# Altium PCB GPS_1.1.PcbDoc
Units mil, origin at the board's own origin, x right, y up, seen from the top; angles counter-clockwise.
Board outline 1968.5 x 2225 mil, 4 copper layers (Top Layer, GND, VDD, Bottom Layer); 60 components, 48 nets, 263 pads, 114 vias.
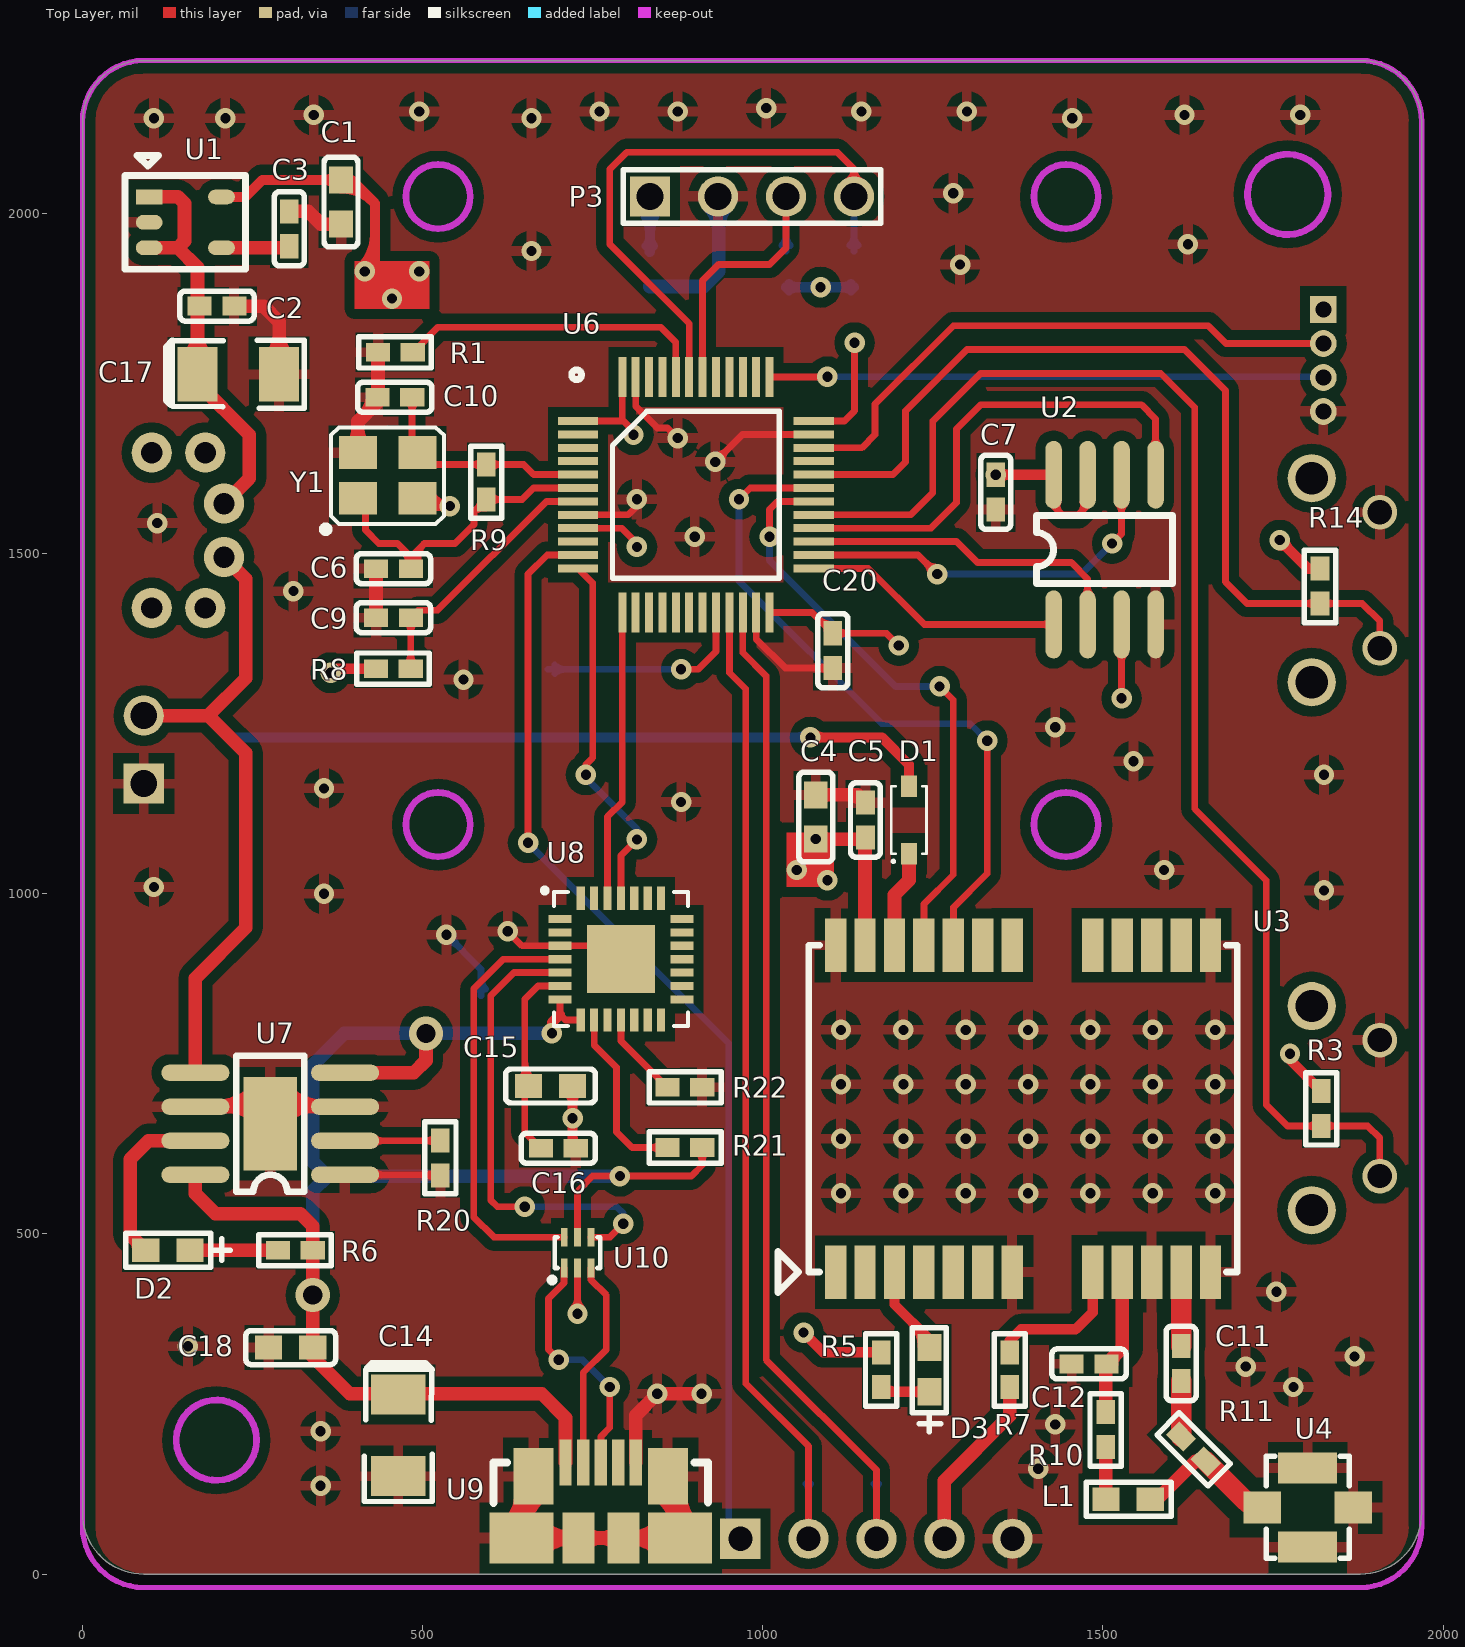
[diagram p0: Top Layer view]
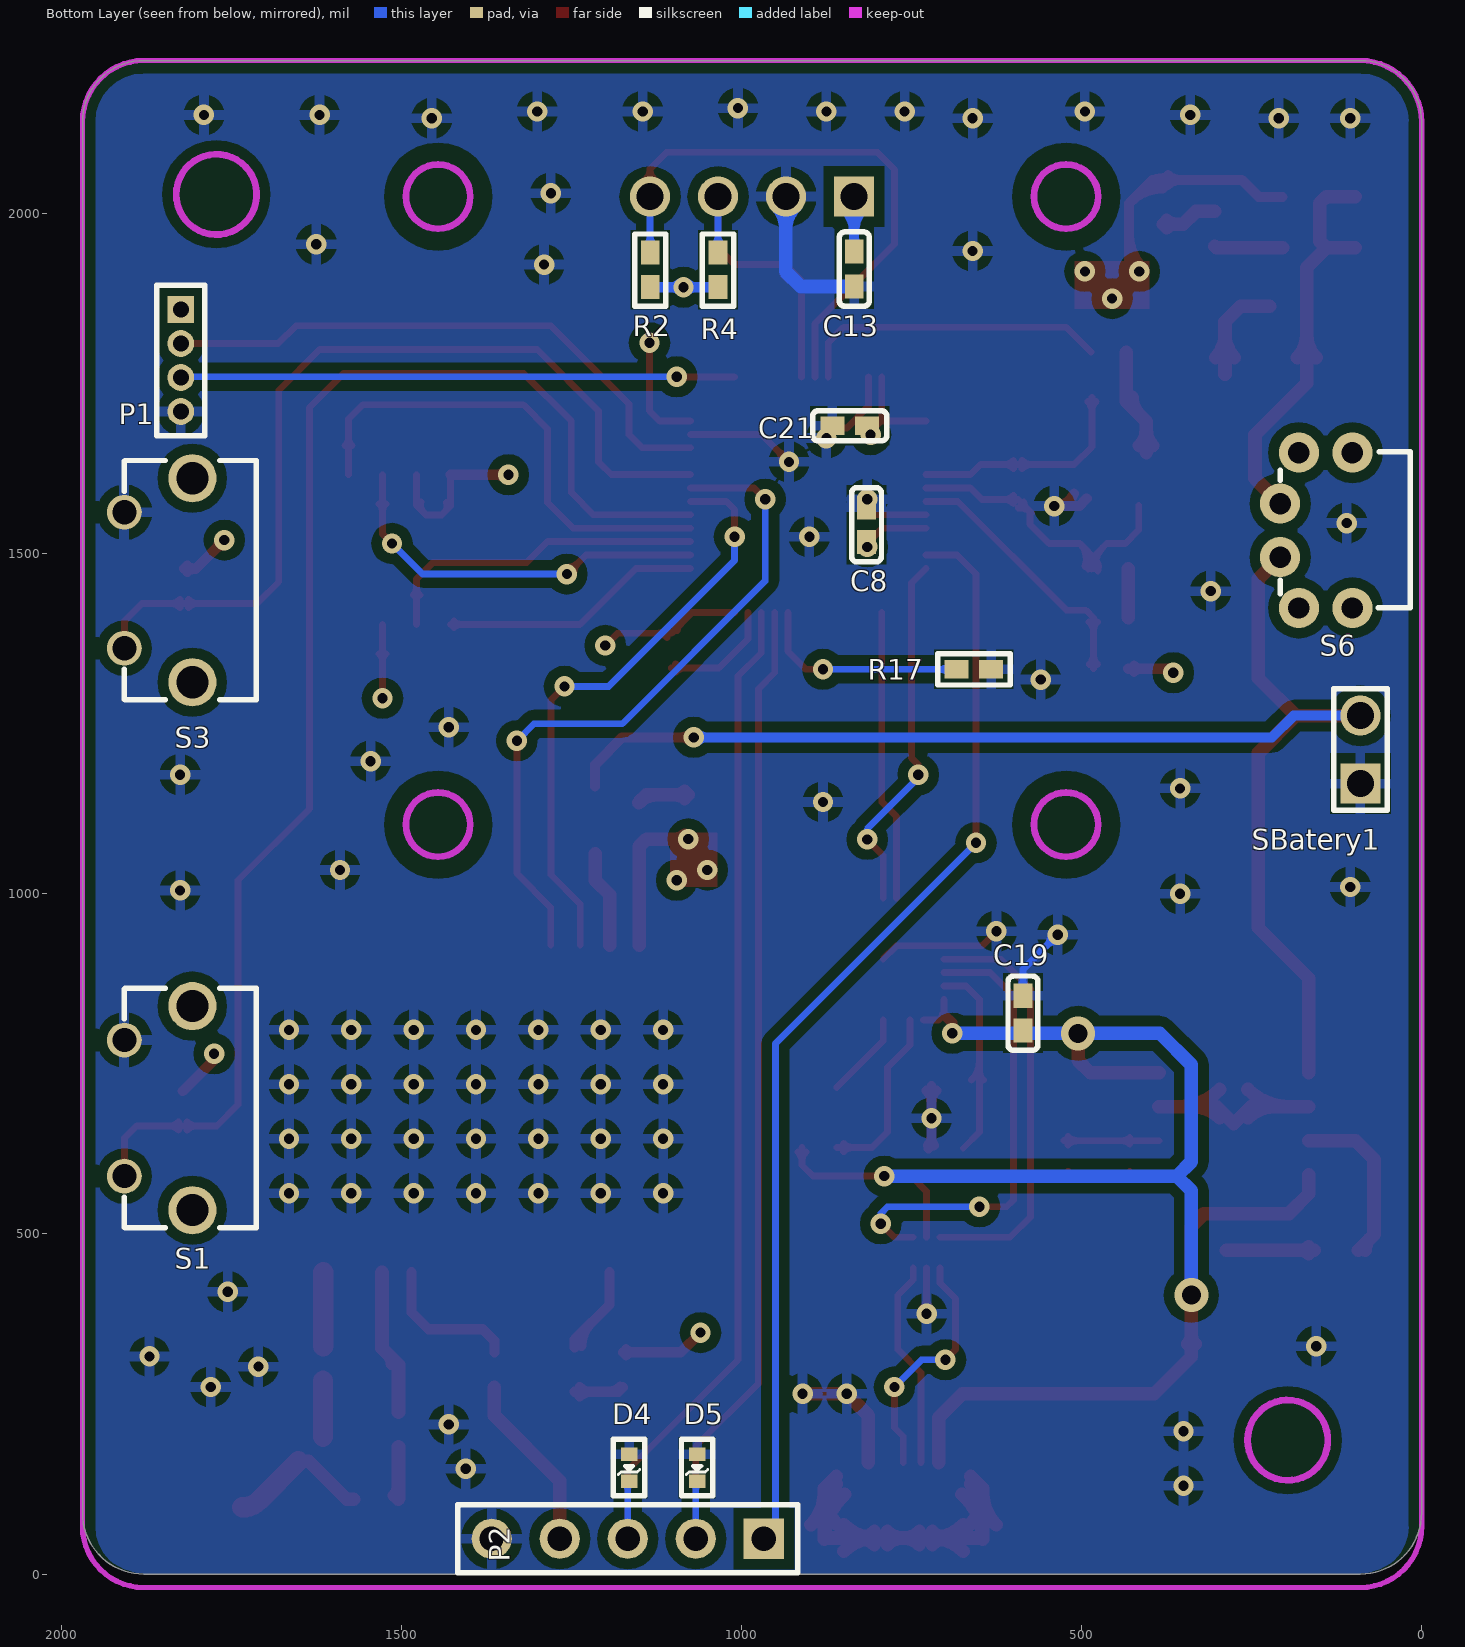
[diagram p1: Bottom Layer view, seen from below]
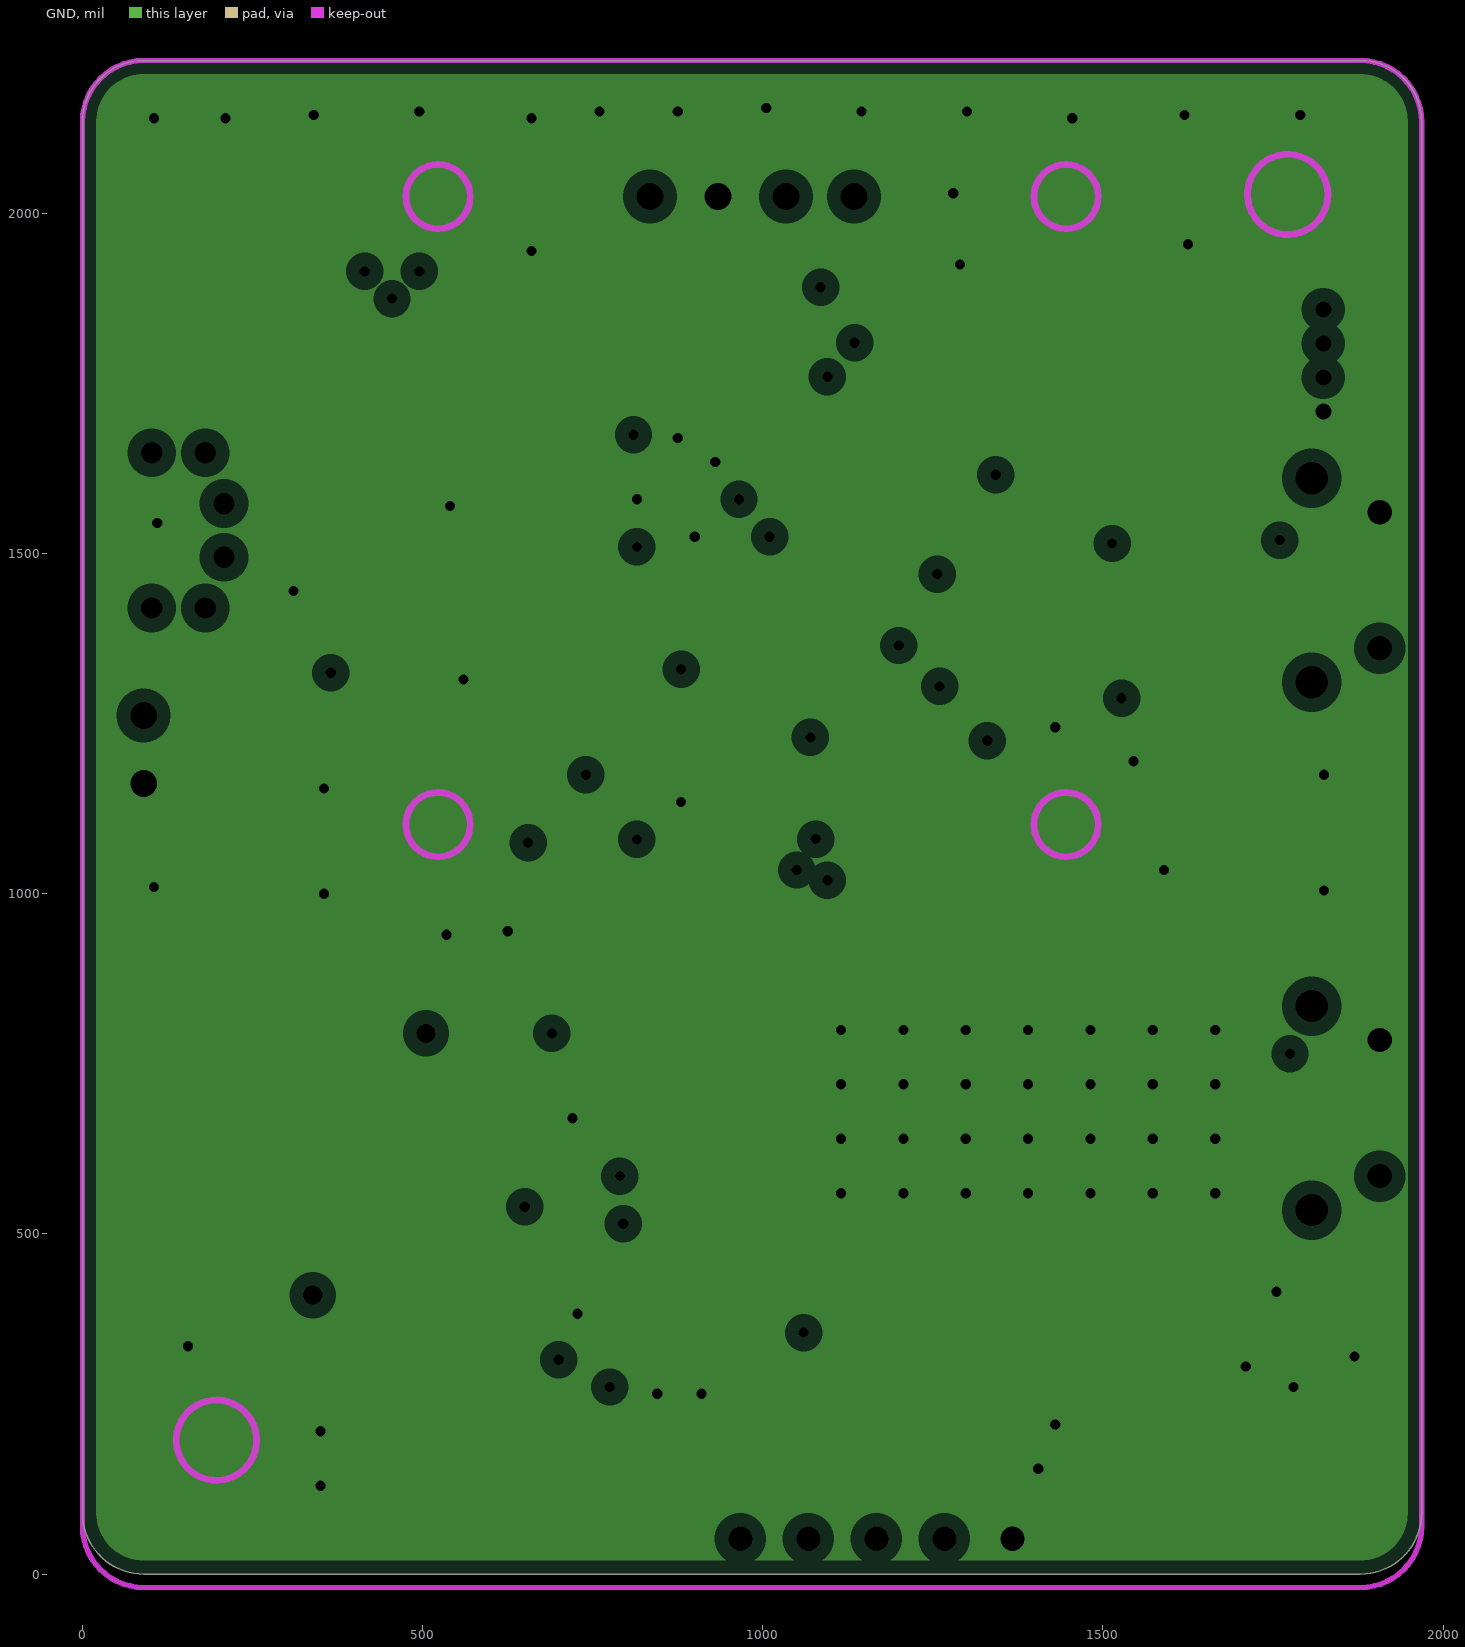
[diagram p2: GND, clearances drawn from the general rule]
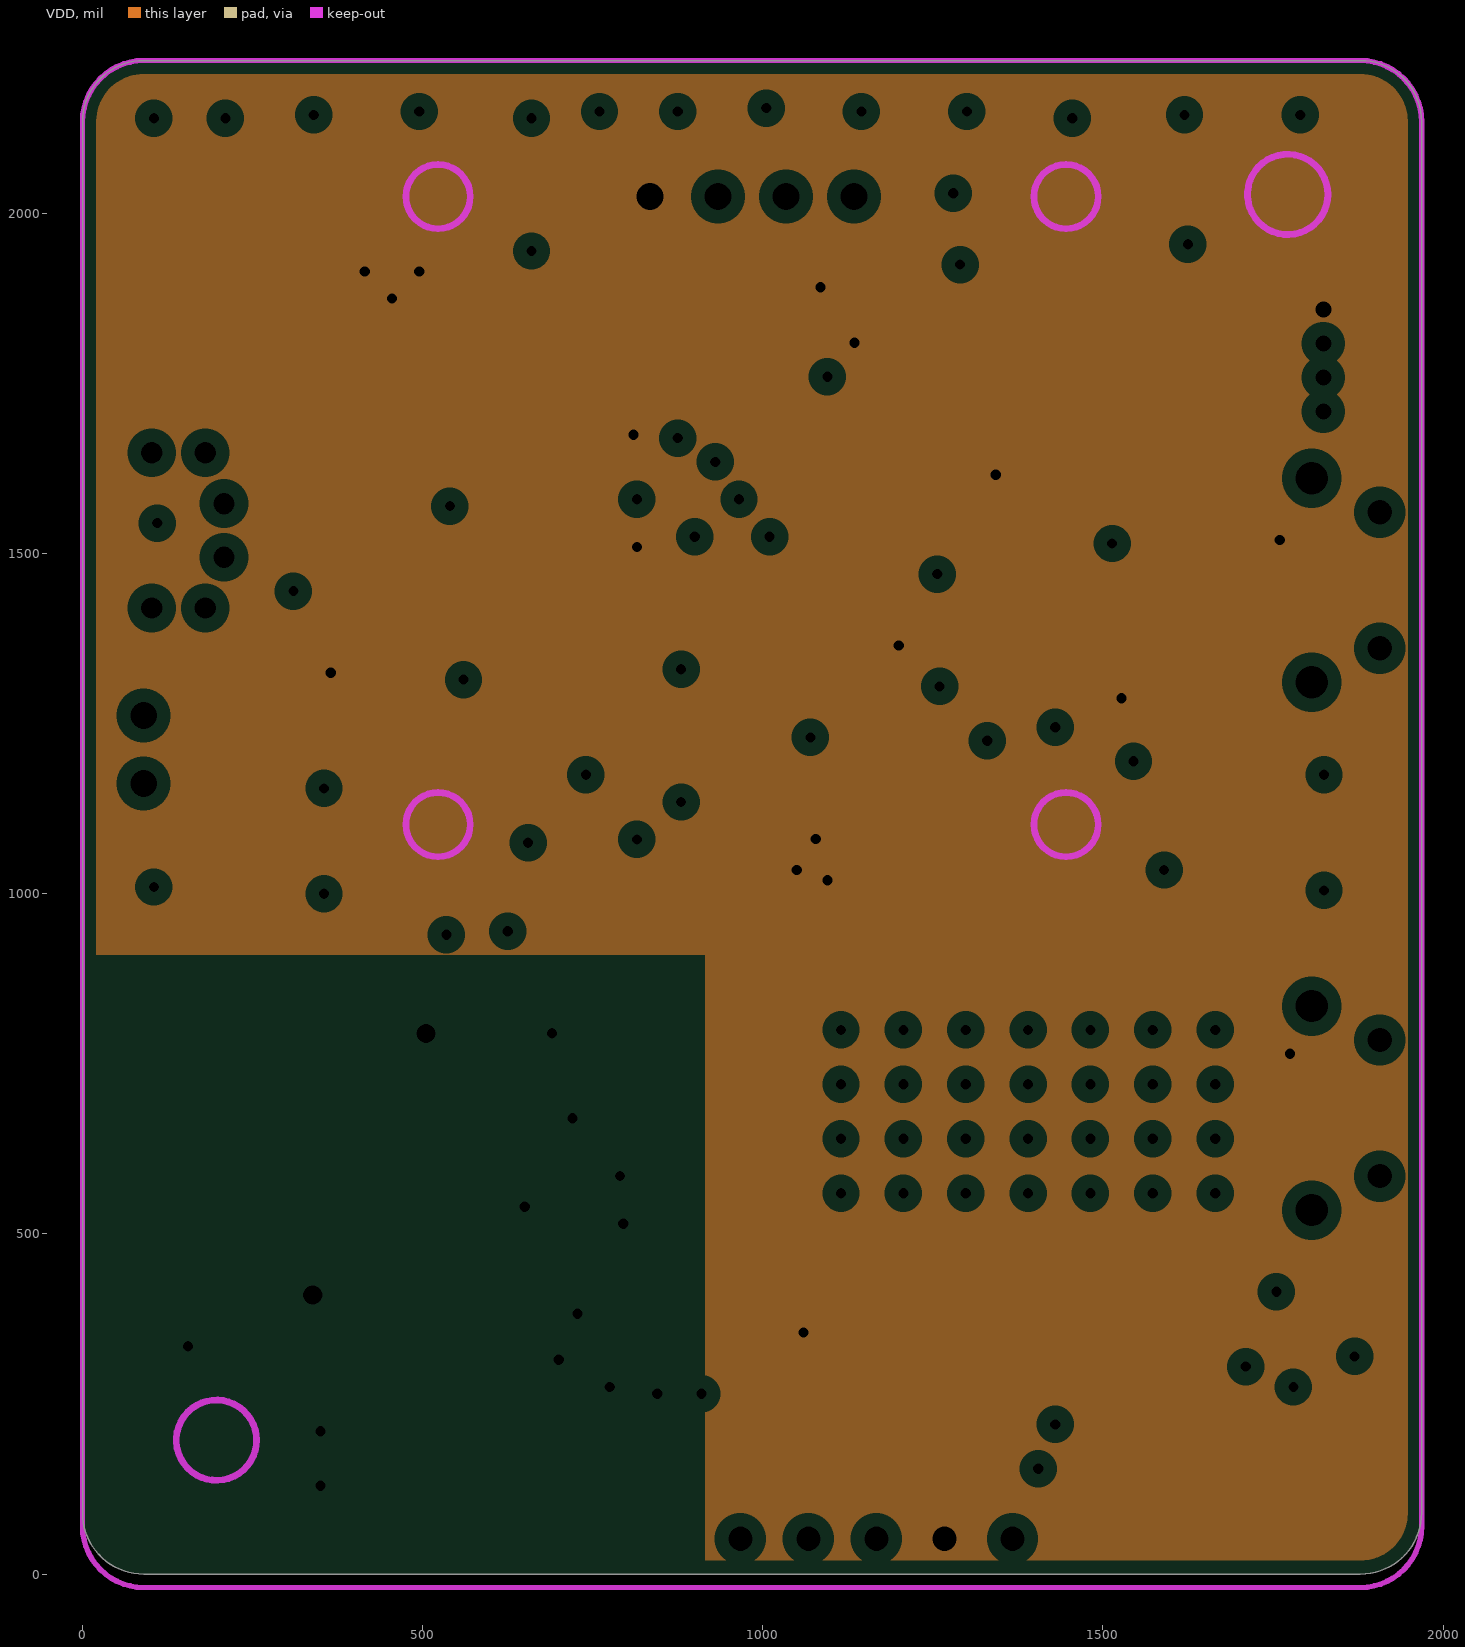
[diagram p3: VDD, clearances drawn from the general rule]

## Layer stack, top to bottom
Top Layer: signal copper 1.4
Dielectric: core 12.6, FR-4, Dk 4.8
GND: plane copper 1.4, net GND
Dielectric: prepreg 12.6, FR-4, Dk 4.8
VDD: plane copper 1.4, net VDD
Dielectric: core 12.6, FR-4, Dk 4.8
Bottom Layer: signal copper 1.4

## Board outline
0,2135 0,90 ccw(c90,90) 90,0 1878.5,0 ccw(c1878.5,90) 1968.5,90 1968.5,2135 ccw(c1878.5,2135) 1878.5,2225 90,2225 ccw(c90,2135) 0,2135

## Design rules (kind name [scope] priority, off if disabled: settings)
Clearance Clearance_1 [InNetClass('RF')] p1: gap=20
Clearance [All] p2: gap=7
DiffPairsRouting [All] p1: maxlimit=10 minlimit=10 mostfreqgap=10 maxuncoupledlength=500
FabricationTestPointUsage TestPointUsage [All] p1: valid=0 allowmultiple=FALSE
FabricationTestpoint Testpoint [All] p1: side=3 testpointundercomponent=TRUE minsize=40 maxsize=100 preferedsize=60 minholesize=0 maxholesize=40 preferedholesize=32 testpointgrid=1 allowsidetop=TRUE allowsidebottom=TRUE usegrid=TRUE gridtolerance=0.01
MinimumSolderMaskSliver [All] p1 off: minsoldermaskwidth=10
PlaneClearance [All] p1: clearance=20
PlaneConnect [All] p1: planeconnectstyle=Relief reliefexpansion=20 reliefentries=4 reliefconductorwidth=15 reliefairgap=10
PolygonConnect [All] p1: connectstyle=Relief reliefconductorwidth=15 reliefentries=4 polygonreliefangle="90 Angle"
RoutingVias [All] p1: holewidth=28 width=50 viastyle="Through Hole" minholewidth=0 minwidth=0 maxholewidth=28 maxwidth=50
SilkToSilkClearance [All] p1 off: silktosilkclearance=10
SilkscreenOverComponentPads [All] p1 off: minsilkscreentomaskgap=10
SolderMaskExpansion [All] p1: expansion=4
Width [All] p1: maxlimit=50 minlimit=10 preferedwidth=10
20 further rules are at their usual default settings.

## Classes and differential pairs
net class RF: NetC11_1 NetL1_1 NetL1_2 RF_IN RF_VCC
differential pair D: +D_P -D_N

## Components (designator, comment, footprint, x,y, rotation, side; value= is the part's Value field where it differs from the comment)
C1 "10uF/10V" C0603 380,2017 r90 top
C2 "0.1uF/10V" C0402 172,1864 r180 top
C3 "0.01uF/10V" C0402 304,1952 r270 top
C4 "10uF/10V" C0603 1078,1113 r90 top
C5 "0.1uF/10V" C0402 1151,1083 r270 top
C6 "18pF/10V" C0402 431.5,1478 r180 top
C7 "0.01uF/10V" C0402 1342.5,1616 r90 top
C8 "0.01uF/10V" C0402 816,1517 r270 bottom
C9 "0.01uF/10V" C0402 431.5,1406 r180 top
C10 "18pF/10V" C0402 433.5,1730 r180 top
C11 "470pF" C0402 1615,284 r270 top
C12 "33nF" C0402 1454,309 r180 top
C13 "0.1uF/10V" C0402 834,1892.82 r270 bottom
C14 "10uF/10V" 3528 464,264 r270 top
C15 "4.7uF/10V" C0603 688,717.5 r180 top
C16 "0.1uF/10V" C0402 673.82,626 r180 top
C17 "10uF/10V" 3528 169,1764 r0 top
C18 "10uF/10V" C0603 306,333 r180 top
C19 "0.1uF/10V" C0402 586,799 r270 bottom
C20 "0.01uF/10V" C0402 1103,1383 r90 top
C21 "0.01uF/10V" C0402 815,1688 r180 bottom
D1 "RB751V40T1" SOD323 1215,1158 r90 top
D2 "LED0" LED0603 158,476 r180 top
D3 "LED0" LED0603 1245,268 r90 top
D4 "PESD0402-140" 0402-TVS 1167,124 r270 bottom
D5 "PESD0402-140" 0402-TVS 1067,124 r270 bottom
L1 "6.8nH" R0603 1537,110 r180 top
P1 "MHDR1X4" SIP4_1.27 1824,1859 r0 bottom
P2 "Header 5" HDR1X5 967,52 r0 bottom
P3 "MHDR1X4" OLED 984.25,2025 r0 top locked
R1 "10K/5%" R0402 485.5,1796 r0 top
R2 "5.1K/5%" R0402 1134,1943 r90 bottom
R3 "10K/5%" R0402 1821,710 r90 top
R4 "5.1K/5%" R0402 1034.25,1943 r90 bottom
R5 "510R" R0402 1174,326 r90 top
R6 "1K/5%" R0402 338.46,476 r0 top
R7 "10K/5%" R0402 1363,326 r90 top
R8 "10K/5%" R0402 482.5,1331 r0 top
R9 "1M/5%" R0402 593.5,1631 r90 top
R10 "50R" R0402 1504,238 r90 top
R11 "0R" R0402 1615,202 r135 top
R14 "10K/5%" R0402 1819,1478 r90 top
R17 "10K/5%" R0402 684,1330 r0 bottom
R20 "2K/5%" R0402 526,586 r270 top
R21 "1K/5%" R0402 859.82,627 r180 top
R22 "10K/5%" R0402 859.82,715.5 r180 top
S1 "SW-PB" KEY2 1907,685 r270 bottom
S3 "SW-PB" KEY2 1907,1461 r270 bottom
S6 "SW-PB" KEY1 208,1573.74 r270 bottom
SBatery1 "SBatery" SIP2 90,1162 r90 bottom
U1 "TPS73633DBVR" SOP5-TPS73633DBVR 98,2024.5 r0 top
U2 "FM25V01" SO-8 1427.5,1396 r90 top
U3 "NEO-M8N" NEO-M8N 1107,444 r0 top
U4 "antenna" "Active antenna" 1801,98 r180 top
U6 "STM32F10xC8T6" LQFP-48 728.5,1695 r0 top
U7 "TP4056" SO-8-1 276,662 r180 top
U8 "CP2102" QFN-28 702,963 r0 top
U9 "USB" MOLEX-47346-0001 710,164 r0 top
U10 "NUF2042XV6T1" UDFN 708,450 r0 top
Y1 "16MHz" OSCILLATOR-3.2X2.5 448.5,1615 r90 top

## Footprints (in the part's own frame and the unit in brackets; to place one, negate y for a bottom-side part, rotate by r counter-clockwise, add the part's x,y. Pads: shape width x height; smd on the part's side, far side on the other; paste and mask are expansions set on the pad)
0402-TVS [mil]
  rect 20x24 smd: 1(-52,2) 2(-12.31,2)
  silkscreen extent -74,-21 9,25
3528 [mil]
  rect 59.05x80 smd: 1(0,0) 2(120,0)
  silkscreen extent -46,-50 157,50
"Active antenna" [mm]
  rect 1.4x1.2 smd: 0(-1.7,0) 1(1.7,0)
  rect 2.2x1.15 smd: 0(0,1.475) 0(0,-1.475)
  silkscreen extent -1.55,-1.91 1.55,1.91
C0402 [mm]
  rect 0.9x0.7 smd: 1(0,0) 2(-1.3,0)
  silkscreen extent -2.04,-0.56 0.74,0.56
C0603 [mil]
  rect 40x35 smd: 1(-32.5,0) 2(32.5,0)
  silkscreen extent -66,-25 66,25
HDR1X5 [mm] "Connector; Header; 5 Position"
  rect 1.5x1.5 hole 0.9: 1(0,0)
  round 1.5 hole 0.9: 2(2.54,0) 3(5.08,0) 4(7.62,0) 5(10.16,0)
  silkscreen extent -1.27,-1.27 11.43,1.27
KEY1 [mm]
  round 1.5 hole 0.8: 0(-1.9,0.7) 0(-1.9,2.7) 0(3.9,0.7) 0(3.9,2.7) 1(0,0) 2(2,0)
  silkscreen extent -1.93,0 3.89,4.85
KEY2 [mm]
  round 1.8 hole 1.2: 0(-3.81,2.54) 0(3.81,2.54)
  round 1.3 hole 0.9: 1(-2.54,0) 2(2.54,0)
  silkscreen extent -4.47,0 4.47,4.93
LED0603 [mil]
  rect 40x35 smd: 1(0,0) 2(65,0)
  silkscreen extent -59,-25 94,25
LQFP-48 [mm]
  rect 1.5x0.3 smd: 1(0,0) 2(0,-0.5) 3(0,-1) 4(0,-1.5) 5(0,-2) 6(0,-2.5) 7(0,-3) 8(0,-3.5) 9(0,-4) 10(0,-4.5) 11(0,-5) 12(0,-5.5) 25(8.8,-5.5) 26(8.8,-5) 27(8.8,-4.5) 28(8.8,-4) 29(8.8,-3.5) 30(8.8,-3) 31(8.8,-2.5) 32(8.8,-2) 33(8.8,-1.5) 34(8.8,-1) 35(8.8,-0.5) 36(8.8,0)
  rect 0.3x1.5 smd: 13(1.65,-7.15) 14(2.15,-7.15) 15(2.65,-7.15) 16(3.15,-7.15) 17(3.65,-7.15) 18(4.15,-7.15) 19(4.65,-7.15) 20(5.15,-7.15) 21(5.65,-7.15) 22(6.15,-7.15) 23(6.65,-7.15) 24(7.15,-7.15) 37(7.15,1.65) 38(6.65,1.65) 39(6.15,1.65) 40(5.65,1.65) 41(5.15,1.65) 42(4.65,1.65) 43(4.15,1.65) 44(3.65,1.65) 45(3.15,1.65) 46(2.65,1.65) 47(2.15,1.65) 48(1.65,1.65)
  silkscreen extent -0.24,-5.86 7.51,1.91
MOLEX-47346-0001 [mil]
  rect 18x67 smd: 1(0,0) 2(26,0) 3(52,0) 4(77.59,0) 5(103.18,0)
  rect 94x75 smd: 6(-65,-111) 9(168.14,-111)
  rect 59x83 smd: 7(-47,-20) 8(150.43,-20)
  rect 47x75 smd: 10(84.97,-111) 11(19,-111)
  silkscreen extent -106,-59 209,0
NEO-M8N [mm]
  rect 0.8x2 smd: 1(0,0) 2(1.1,0) 3(2.2,0) 4(3.3,0) 5(4.4,0) 6(5.5,0) 7(6.6,0) 8(9.6,0) 9(10.7,0) 10(11.8,0) 11(12.9,0) 12(14,0) 13(14,12.2) 14(12.9,12.2) 15(11.8,12.2) 16(10.7,12.2) 17(9.6,12.2) 18(6.6,12.2) 19(5.5,12.2) 20(4.4,12.2) 21(3.3,12.2) 22(2.2,12.2) 23(1.1,12.2) 24(0,12.2)
  silkscreen extent -2.14,-0.76 15,12.2
OLED [mm]
  rect 1.5x1.5 hole 1: 1(-3.81,0)
  round 1.5 hole 1: 2(-1.27,0) 3(1.27,0) 4(3.81,0)
  Keep-Out Layer circle w0.254: c11.725,-23.45 r1.2
  Keep-Out Layer circle w0.254: c-11.725,0 r1.2
  Keep-Out Layer circle w0.254: c11.725,0 r1.2
  Keep-Out Layer circle w0.254: c-11.725,-23.45 r1.2
  silkscreen extent -4.81,-1 4.81,1
OSCILLATOR-3.2X2.5 [mil]
  rect 48x56 smd: 1(-33.73,43.65) 2(-33.73,-43.65) 3(33.73,-43.65) 4(33.73,43.65)
  silkscreen extent -83,-83 71,95
QFN-28 [mil]
  rect 34x12 smd mask+5: 1(0,0) 2(0,-19.68) 3(0,-39.37) 4(0,-59.06) 5(0,-78.74) 6(0,-98.43) 7(0,-118.11) 15(179,-118.11) 16(179,-98.43) 17(179,-78.74) 18(179,-59.06) 19(179,-39.37) 20(179,-19.68) 21(179,0)
  rect 12x34 smd mask+5: 8(30.44,-148.56) 9(50.13,-148.56) 10(69.82,-148.56) 11(89.5,-148.56) 12(109.18,-148.56) 13(128.87,-148.56) 14(148.56,-148.56) 22(148.56,30.44) 23(128.87,30.44) 24(109.18,30.44) 25(89.5,30.44) 26(69.82,30.44) 27(50.13,30.44) 28(30.44,30.44)
  rect 100x100 smd mask+5: 29(89.5,-59.06)
  silkscreen extent -25,-158 188,44
R0402 [mm]
  rect 0.9x0.7 smd: 1(0,0) 2(-1.3,0)
  silkscreen extent -2.01,-0.58 0.69,0.58
R0603 [mil]
  rect 40x35 smd: 1(-32.5,0) 2(32.5,0)
  silkscreen extent -63,-25 62,25
SIP2 [mm]
  rect 1.5x1.5 hole 1: 1(0,0)
  round 1.5 hole 1: 2(2.54,0)
  silkscreen extent -1,-1 3.54,1
SIP4_1.27 [mm]
  rect 1x1 hole 0.6: 1(0,0)
  round 1 hole 0.6: 2(0,1.27) 3(0,2.54) 4(0,3.81)
  silkscreen extent -0.9,-0.9 0.9,4.71
SO-8 [mil]
  oval 100x24 smd: 1(0,0) 2(0,-50) 3(0,-100) 4(0,-150) 5(220,-150) 6(220,-100) 7(220,-50) 8(220,0)
  silkscreen extent 60,-175 160,25
SO-8-1 [mil]
  rect 78.74x137.8 smd: 0(0,0)
  oval 100x24 smd: 1(-110,75) 2(-110,25) 3(-110,-25) 4(-110,-75) 5(110,-75) 6(110,-25) 7(110,25) 8(110,75)
  silkscreen extent -50,-100 50,100
SOD323 [mil]
  rect 32x24 smd: 1(0,0) 2(-99.21,0)
  silkscreen extent -112,-26 0,26
SOP5-TPS73633DBVR [mm]
  rect 1x0.55 smd: 1(0,0)
  oval 1x0.55 smd: 2(0,-0.95) 3(0,-1.9) 4(2.7,-1.9) 5(2.7,0)
  silkscreen extent -0.9,-2.7 3.6,1.55
UDFN [mm]
  rect 0.25x0.7 smd: 1(0,0) 2(0.5,0) 3(1,0) 4(1,1.15) 5(0.5,1.15) 6(0,1.15)
  silkscreen extent -0.55,-0.55 1.35,1.15

## Part data
C1 C2 C3 C4 C5 C6 C7 C8 C9 C10 C11 C12 C13 C15 C16 C18 C19 C20 C21: library part Cap, "Capacitor"
C14 C17: library part "Cap Pol2", "Polarized Capacitor (Axial)"
D1: library part Diode, "Default Diode"
D2 D3: "Typical INFRARED GaAs LED"
D4 D5: library part "D Zener", "Zener Diode"
L1: library part Inductor, "Inductor"
P1 P3: "Header, 4-Pin"
P2: "Header, 5-Pin"
R1 R2 R3 R4 R5 R6 R7 R8 R9 R10 R11 R14 R17 R20: library part Res2, "Resistor"
R21 R22: library part Resistor, "Resistor SMD - IEC symbol version"
S1 S3 S6: "Switch"
U2: library part FM25CL64B
U6: library part STM32F100C8T6
U8: "Imported"
U9: library part MICRO_USB
Y1: library part XTAL3

## Via types
v1: diameter 30, hole 15, Top Layer to Bottom Layer, 112 vias
v2: diameter 50, hole 28, Top Layer to Bottom Layer, 2 vias

## Nets (pads, with @x,y where several pads share a name; then routed paths per layer and width w, separated by ;. In a path a pad name is that pad's centre, name@x,y a point inside that pad or via, vN(x,y) a via of type N, cw(c..) or ccw(c..) an arc to the next point about the centre after c; other vN are vias at no path point)
BAT: D1.1 S6.2 SBatery1.2 U7.5 | length 2186.2
  Top Layer w15: v1(1070,1230) 1175,1230 1215,1190 D1.1 ; v1@1075.3,1224.7 cw(c1088.11,1211.89) 1088.11,1230 cw(c1088.11,1248.11) v1@1075.3,1235.3
  Top Layer w20: SBatery1.2 185,1262 ; U7.5 166,876 240,950 240,1207.19 ; S6.2 240,1463 240,1317 185,1262 ; 239.91,1207.09 185,1262
  Bottom Layer w15: SBatery1.2 188,1262 220,1230 v1(1070,1230) ; v1@1064.7,1224.7 ccw(c1051.89,1211.89) 1051.89,1230 ccw(c1051.89,1248.11) v1@1064.7,1235.3
D_N: U8.5 U10.4 | length 690.3
  Top Layer w10: v1(650,540) 610,540 600,550 600,850 634.26,884.26 U8.5 ; U10.4 775.28,495.28 v1(795,515)
  Bottom Layer w10: v1(650,540) 785,540 795,530 v1(795,515)
D_P: U8.4 U10.6 | length 625.5
  Top Layer w10: U8.4 618.94,903.94 575,860 575,525 604.72,495.28 U10.6
FRAM_CLK: U2.6 U6.26 | length 640.1
  Top Layer w10: U6.26 1228.35,1498.15 v1(1256.5,1470) ; v1@1246.5,1470 ccw(c1222.36,1470) 1239.43,1487.07 ccw(c1256.5,1504.14) v1@1256.5,1480 ; v1(1513.5,1515) 1527.5,1529 U2.6 ; U2.6@1522.55,1573.05 cw(c1510.6,1561.1) 1527.5,1561.1 cw(c1544.4,1561.1) U2.6@1532.45,1573.05
  Bottom Layer w10: v1(1256.5,1470) 1468.5,1470 v1(1513.5,1515)
FRAM_CS: U2.1 U6.25 | length 413.2
  Top Layer w10: U6.25 1155.04,1478.47 1237.5,1396 U2.1 ; U2.1@1422.55,1391.05 ccw(c1410.6,1379.1) 1410.6,1396 ccw(c1410.6,1412.9) U2.1@1422.55,1400.95
FRAM_MISO: U2.2 U6.27 | length 518.8
  Top Layer w10: U6.27 1284.67,1517.84 1315.5,1487 1453.5,1487 1477.5,1463 U2.2 ; U2.2@1472.55,1438.95 ccw(c1460.6,1450.9) 1477.5,1450.9 ccw(c1494.4,1450.9) U2.2@1482.45,1438.95
FRAM_MOSI: U2.5 U6.28 | length 758.5
  Top Layer w10: U6.28 1247.52,1537.52 1285,1575 1285,1683.5 1320.5,1719 1556.5,1719 1577.5,1698 U2.5 ; U2.5@1572.55,1658.95 ccw(c1560.6,1670.9) 1577.5,1670.9 ccw(c1594.4,1670.9) U2.5@1582.45,1658.95
GND: C1.1 C2.2 C3.2 C4.2 C5.2 C6.1 C7.2 C8.2 C9.1 C10.1 C12.1 C13.1 C14.2 C15.1 C16.2 C17.2 C18.2 C19.2 C20.2 C21.2 D4.1 D5.1 P1.4 P2.5 P3.2 R1.2 R17.2 R20.1 R22.2 S1.1 S3.1 SBatery1.1 U1.2 U2.4 U3.7 U3.10 U3.12 U3.13 U3.24 U4.0 U6.8 U6.23 U6.35 U6.47 U7.0 U7.1 U7.3 U7.6 U8.3 U8.29 U9.5 U9.6 U9.7 U9.8 U9.9 U9.10 U9.11 U10.2 Y1.2 Y1.4 | length 4553.1
  Top Layer w10: U7.1 525,587 R20.1 ; U7.1@428.95,582.05 cw(c440.9,570.1) 440.9,587 cw(c440.9,603.9) U7.1@428.95,591.95 ; 502.39,587 cw(c502.39,562.39) R20.1@519.79,579.79 ; 507.22,587 ccw(c507.22,604.78) R20.1@519.79,592.21 ; v1(625,945) 646.37,923.63 U8.3 771.82,923.63 U8.29 ; v1@720.61,389.76 ccw(c703.54,406.83) 727.69,406.83 ccw(c751.83,406.83) v1@734.76,389.76 ; v1(727.68,382.68) U10.2 ; U6.8 802.21,1557.2 815,1570 v1(815,1580) ; U6.47 813.15,1716.85 845,1685 860,1685 v1(875,1670) ; v1(930,1635) 970.32,1675.32 U6.35 ; v1@930,1645 ccw(c930,1669.14) 947.07,1652.07 ccw(c964.14,1635) v1@940,1635 ; U6.23 990.31,1374.69 1033.18,1331.82 C20.2 ; C20.2@1096.79,1325.61 ccw(c1081.8,1310.62) 1081.8,1331.82 ccw(c1081.8,1353.01) C20.2@1096.79,1338.03
  Top Layer w15: Y1.2 503.43,1570 v1(540,1570) cw(c540,1601.99) Y1.2@511.07,1588.32 ; C15.1@713.43,710.43 cw(c696.36,693.36) 720.5,693.36 cw(c744.64,693.36) C15.1@727.57,710.43 ; C16.2@716.62,630.44 ccw(c707.26,639.8) 720.5,639.8 ; 720.5,642.52 ccw(c737.58,642.52) C16.2@725.5,630.44 ; C15.1 720.5,630.5 C16.2
  Top Layer w20: U7.6 251,687 U7.0 301,687 U7.3 ; U7.6@194.16,687 ccw(c194.16,773.36) U7.0@255.23,712.3 ; 216.02,687 cw(c216.02,631.55) U7.0@255.23,670.76 ; C2.2 266,1864 289,1841 C17.2 ; C17.2@275.19,1788.28 ccw(c241.86,1821.62) 289,1821.62 ccw(c336.14,1821.62) C17.2@302.81,1788.28 ; U7.0@296.77,670.76 cw(c335.98,631.55) 335.98,687 ; U7.0@296.77,712.3 ccw(c357.84,773.36) U7.3@357.84,687 ; C3.2 331.82,2003.18 350.5,1984.5 C1.1 ; C1.1@374.7,1979.2 ccw(c361.89,1966.39) 361.89,1984.5 ccw(c361.89,2002.61) C1.1@374.7,1989.8 ; Y1.4@394.95,1658.63 ccw(c371.05,1682.53) 404.85,1682.53 ccw(c438.65,1682.53) Y1.4@414.75,1658.63 ; Y1.4 404.85,1694.35 433.5,1723 434.32,1723.82 R1.2 ; 415.38,1704.88 ccw(c390.26,1730) C10.1@425.79,1730 ; C9.1 C6.1 ; U9.6@625.55,72.45 ccw(c578.61,119.39) 645,119.39 ccw(c711.39,119.39) U9.6@664.45,72.45 ; U9.6@645,50.98 cw(c731.77,50.98) U9.7@675.62,117.13 ; 645,94.19 cw(c695.09,94.19) U9.7@662.68,132.38 ; U9.7 645,126 U9.6 U9.11 U9.10 U9.9 878.14,126.28 U9.8 ; U9.6@673.95,33.55 cw(c720.89,-13.39) 720.89,53 cw(c720.89,119.39) U9.6@673.95,72.45 ; U9.11@719.45,43.45 ccw(c696.41,20.41) 696.41,53 ccw(c696.41,85.59) U9.11@719.45,62.55 ; U9.11@738.55,43.45 cw(c761.59,20.41) 761.59,53 cw(c761.59,85.59) U9.11@738.55,62.55 ; U9.10@785.43,43.45 ccw(c762.38,20.41) 762.38,53 ccw(c762.38,85.59) U9.10@785.43,62.55 ; U9.10@804.52,43.45 cw(c827.56,20.41) 827.56,53 cw(c827.56,85.59) U9.10@804.52,62.55 ; U9.5 813.18,233.18 v1(845,265) v1(910,265) ; U9.8@847.73,117.2 cw(c790.98,51.04) U9.9@878.14,51.04 ; U9.9@849.2,33.55 ccw(c802.25,-13.39) 802.25,53 ccw(c802.25,119.39) U9.9@849.2,72.45 ; U9.9@858.7,72.45 ccw(c811.75,119.39) 878.14,119.39 ccw(c944.53,119.39) U9.9@897.59,72.45 ; U9.8@860.75,132.38 cw(c828.3,94.55) 878.14,94.55 ; C4.2 1139.68,1145.5 C5.2 ; C4.2@1083.3,1140.2 cw(c1096.11,1127.39) 1096.11,1145.5 cw(c1096.11,1163.61) C4.2@1083.3,1150.8 ; 1124.05,1145.5 cw(c1124.05,1111.17) C5.2@1148.33,1135.45
  Bottom Layer w10: v1@535,930 cw(c535,905.86) 552.07,922.93 cw(c569.14,940) v1@545,940 ; v1(535,940) 586,889 C19.2 ; C19.2@579.79,860.33 ccw(c564.8,875.31) 586,875.31 ccw(c607.2,875.31) C19.2@592.21,860.33
  Bottom Layer w20: C13.1 912.82,1892.82 935,1915 935,2024.25 P3.2 ; P3.2@920.44,2011.19 cw(c885.3,1976.05) 935,1976.05 ; 935,1979.66 cw(c979.59,1979.66) P3.2@948.06,2011.19
  other v1: 350,130 1405,155 350,210 1430,220 1780,275 1710,305 1870,320 155,335 1755,415 1115,560 1206.67,560 1298.33,560 1390,560 1481.67,560 1573.33,560 1665,560 1115,640 1206.67,640 1298.33,640 1390,640 1481.67,640 1573.33,640 1665,640 720.5,670 1115,720 1206.67,720 1298.33,720 1390,720 1481.67,720 1573.33,720 1665,720 1115,800 1206.67,800 1298.33,800 1390,800 1481.67,800 1573.33,800 1665,800 355,1000 1825,1005 105,1010 1590,1035 880,1135 355,1155 1825,1175 1545,1195 1430,1245 560,1315 310,1445 900,1525 110,1545 1290,1925 660,1945 1625,1955 1280,2030 105,2140 210,2140 660,2140 1455,2140 340,2145 1620,2145 1790,2145 495,2150 760,2150 875,2150 1145,2150 1300,2150 1005,2155
KEY0: R3.2 S1.2 U6.29 | length 2106.7
  Top Layer w10: U6.29 1217.21,1557.2 1250,1590 1250,1695 1320,1765 1585,1765 1635,1715 1635,1125 1740,1020 1740,690 1771.18,658.82 R3.2 1889.18,658.82 1907,641 S1.2 ; R3.2@1814.79,652.61 ccw(c1799.8,637.62) 1799.8,658.82 ccw(c1799.8,680.01) R3.2@1814.79,665.03 ; R3.2@1827.21,652.61 cw(c1842.2,637.62) 1842.2,658.82 cw(c1842.2,680.01) R3.2@1827.21,665.03
KEY1: U6.33
KEY2: R14.2 S3.2 U6.32 | length 1388.8
  Top Layer w10: U6.32 1191.26,1616.26 1210,1635 1210,1710 1300,1800 1620,1800 1680,1740 1680,1458.64 1711.82,1426.82 R14.2 1881.18,1426.82 1907,1401 S3.2 ; R14.2@1812.79,1420.61 ccw(c1797.8,1405.62) 1797.8,1426.82 ccw(c1797.8,1448.01) R14.2@1812.79,1433.03 ; R14.2@1825.21,1420.61 cw(c1840.2,1405.62) 1840.2,1426.82 cw(c1840.2,1448.01) R14.2@1825.21,1433.03
NetC2_1: C2.1 C17.1 S6.1 U1.1 U1.3 | length 676.6
  Top Layer w20: U1.3 140,1949.7 ; U1.1 98.5,2025 140,2025 150,2015 150,1959.7 140,1949.7 ; C17.1@155.19,1788.28 ccw(c121.86,1821.62) 169,1821.62 ccw(c216.14,1821.62) C17.1@182.81,1788.28 ; S6.1 245,1610.74 245,1675 169,1751 C17.1 169,1920.7 140,1949.7
NetC3_1: C3.1 U1.4 | length 100.7
  Top Layer w20: U1.4 301.7,1949.7 C3.1
NetC11_1: C11.1 R11.1 | length 82
  Top Layer w30: R11.1 C11.1
NetC15_2: C15.2 C16.1 U8.6 | length 336.4
  Top Layer w10: C15.2@644.16,726.34 ccw(c630.07,740.43) 650,740.43 ; 650,754.92 ccw(c690.42,754.92) C15.2@661.84,726.34 ; C16.1 650,649.82 650,845 669.57,864.57 U8.6
NetD1_2: D1.2 U3.22 | length 143.3
  Top Layer w20: U3.22 1193.61,998.61 1215,1020 D1.2
NetD2_1: D2.1 R6.2 | length 157.7
  Top Layer w20: D2.1 R6.2 ; D2.1@165.8,470.7 cw(c178.61,457.89) 178.61,476 cw(c178.61,494.11) D2.1@165.8,481.3
NetD2_2: D2.2 U7.7 | length 269.7
  Top Layer w20: D2.2@75.93,493.07 cw(c58.86,476) D2.2@83,476 ; D2.2 70,499 70,610 97,637 U7.7
NetD3_1: D3.1 R5.2 | length 131.4
  Top Layer w15: R5.2 1180.82,268 D3.1 ; R5.2@1178.44,275.32 ccw(c1196.12,293) 1196.12,268 ; D3.1@1237.93,260.93 ccw(c1220.86,243.86) 1220.86,268 ccw(c1220.86,292.14) D3.1@1237.93,275.07
NetD3_2: D3.2 U3.3 | length 169.3
  Top Layer w15: U3.3 1193.61,396.39 1245,345 D3.2 ; 1221.21,368.79 cw(c1187.92,335.5) D3.2@1235,335.5
NetL1_1: L1.1 R11.2 U4.1 | length 214.2
  Top Layer w20: L1.1 1580,110 1635.81,165.81 R11.2
  Top Layer w30: R11.2 1708.34,108.66 ccw(c1734.07,134.38) U4.1
NetL1_2: L1.2 R10.2 | length 92.6
  Top Layer w20: 1504,129.31 ccw(c1523.81,129.31) L1.2@1509.8,115.3 ; R10.2 1504,110.5 L1.2
NetR1_1: R1.1 U6.44 | length 461.8
  Top Layer w10: R1.1 522.5,1833 849.5,1833 872.2,1810.3 U6.44
NetR7_1: R7.1 U3.8 | length 215.3
  Top Layer w15: R7.1 1363,343 1380,360 1459.91,360 1484.95,385.05 U3.8
NetR17_1: R17.1 U6.20 | length 348.7
  Top Layer w10: v1(880,1330) 905,1330 931.26,1356.26 U6.20
  Bottom Layer w10: R17.1 v1(880,1330) ; R17.1@694.15,1323.79 cw(c709.13,1308.8) 709.13,1330 cw(c709.13,1351.2) R17.1@694.15,1336.21
NetR20_2: R20.2 U7.2 | length 199.9
  Top Layer w10: U7.2 525.82,637 R20.2 ; U7.2@428.95,632.05 cw(c440.9,620.1) 440.9,637 cw(c440.9,653.9) U7.2@428.95,641.95 ; 504.37,637 ccw(c504.37,658.81) R20.2@519.79,643.39 ; 505.24,637 cw(c505.24,616.42) R20.2@519.79,630.97
NetR21_1: R21.1 U8.9 | length 295.7
  Top Layer w10: U8.9 752.13,777.87 785,745 785,650 808,627 R21.1 ; R21.1@849.67,620.79 ccw(c834.69,605.8) 834.69,627 ccw(c834.69,648.2) R21.1@849.67,633.21
NetR22_1: R22.1 U8.11 | length 127.2
  Top Layer w10: U8.11 791.5,783.82 R22.1
NetU9_2: U9.2 U10.3 | length 309.5
  Top Layer w10: U9.2 736,296 770,330 770,410 747.37,432.63 U10.3
NetU9_3: U9.3 U10.1 | length 358.7
  Top Layer w10: v1(700,315) 685,330 685,405 708,428 U10.1 ; U9.3 762,202.12 775,215.12 v1(775,275)
  Bottom Layer w10: v1(700,315) 735,315 v1(775,275)
NRST: C9.2 R8.1 U6.7 | length 458
  Top Layer w10: R8.1@476.3,1337.21 ccw(c461.31,1352.2) 482.5,1352.2 ccw(c503.7,1352.2) R8.1@488.71,1337.21 ; C9.2@476.48,1399.79 cw(c461.93,1385.24) 482.5,1385.24 ; R8.1 C9.2@482.5,1405.82 ; 482.5,1384.37 cw(c504.32,1384.37) C9.2@488.89,1399.79 ; C9.2 493.68,1417 522,1417 681.89,1576.89 U6.7
OSC_IN: C10.2 R9.1 U6.5 Y1.3 | length 433.7
  Top Layer w10: C10.2@478.48,1723.79 cw(c463.93,1709.24) 484.5,1709.24 ; 484.5,1708.37 cw(c506.32,1708.37) C10.2@490.89,1723.79 ; C10.2@484.5,1730 484.5,1657.17 510.67,1631 R9.1 648.5,1631 663.24,1616.26 U6.5 ; R9.1@587.3,1624.79 ccw(c572.31,1609.8) 572.31,1631 ccw(c572.31,1652.2) R9.1@587.3,1637.21 ; R9.1@599.71,1624.79 cw(c614.7,1609.8) 614.7,1631 cw(c614.7,1652.2) R9.1@599.71,1637.21
OSC_OUT: C6.2 R9.2 U6.6 Y1.1 | length 662.2
  Top Layer w10: Y1.1@415.85,1571.05 415.85,1534.65 435.5,1515 462.87,1515 482.68,1495.18 ; 467.91,1509.95 cw(c438.6,1480.64) C6.2@479.97,1477.92 ; C6.2@476.06,1474.21 cw(c492.71,1480.19) 480.2,1492.7 ; C6.2@477.54,1485.12 ccw(c470.27,1495.18) 482.69,1495.18 ; C6.2 482.68,1495.18 ; 483.51,1494.35 cw(c467.88,1478.71) C6.2@489.94,1477.26 ; C6.2@485.47,1477.59 cw(c509.12,1486.08) 491.35,1503.85 ; C6.2@487.83,1485.12 cw(c495.11,1495.18) 482.68,1495.18 ; C6.2@494.88,1480.97 cw(c525.53,1491.98) 502.5,1515 ; 573.54,1559.85 cw(c591.23,1542.16) R9.2@592.91,1567.12 ; R9.2@581.3,1567.62 ccw(c573.03,1575.88) R9.2@584.72,1575.88 ; R9.2@599.71,1573.61 cw(c614.7,1558.62) 614.7,1579.82 cw(c614.7,1601.01) R9.2@599.71,1586.03 ; U6.6 663.08,1596.57 646.32,1579.82 R9.2 575.5,1561.82 575.5,1543 547.5,1515 502.5,1515 ; 482.68,1495.18 502.5,1515
RF_IN: C11.2 U3.11 | length 108.8
  Top Layer w30: C11.2@1614.87,335.18 U3.11
RF_VCC: C12.2 R10.1 U3.9 | length 230.7
  Top Layer w20: R10.1 1504,307.82 C12.2 1528.26,332.08 U3.9 ; C12.2@1512.9,309 cw(c1531.53,309) C12.2@1518.35,322.17
RXD_G: U3.21 U6.30 | length 878.3
  Top Layer w10: v1(1010,1525) 1010,1565 1021.89,1576.89 U6.30 ; U3.21 1236.92,985 1280,1028.08 1280,1285 v1(1260,1305)
  Bottom Layer w10: v1(1010,1525) 1010,1490 1195,1305 v1(1260,1305)
RXD_S: D4.2 P2.3 U6.22 | length 1546.1
  Top Layer w10: U6.22 970.63,1354.37 1005,1320 1005,315 1167,153 P2.3
  Bottom Layer w10: D4.2@1163.46,132.78 cw(c1154.93,124.24) 1167,124.24 cw(c1179.07,124.24) D4.2@1170.54,132.78 ; P2.3 D4.2@1167,136.31
RXD_USB: U6.13 U8.26 | length 429
  Top Layer w10: U8.26 771.82,1113.35 793.46,1135 793.46,1306.54 U6.13
S_EN: P2.1 U6.11 | length 1632.4
  Top Layer w10: v1(655,1075) 655,1470 683.15,1498.15 U6.11
  Bottom Layer w10: v1(655,1075) 950,780 950,69 P2.1
SCL: P3.3 R4.1 U6.42 | length 473.3
  Top Layer w10: U6.42 911.57,1901.57 935,1925 1010,1925 1034.25,1949.25 P3.3
  Bottom Layer w10: R4.1@1028.04,1953.15 ccw(c1013.06,1968.13) 1034.25,1968.13 ccw(c1055.45,1968.13) R4.1@1040.46,1953.15 ; R4.1@1034.25,1944.75 P3.3
SDA: P3.4 R2.1 U6.43 | length 934.2
  Top Layer w10: U6.43 891.89,1838.11 775,1955 775,2065 800,2090 1110,2090 1134.25,2065.75 ; P3.4@1122.77,2046.67 ccw(c1112.67,2065.75) 1134.25,2065.75 ; P3.4 1134.25,2065.75 ; P3.4@1145.73,2046.67 cw(c1155.83,2065.75) 1134.25,2065.75
  Bottom Layer w10: R2.1@1127.79,1953.15 ccw(c1112.2,1968.74) 1134.25,1968.74 ; R2.1@1134.25,1944.75 P3.4 ; 1134.25,1967.52 ccw(c1154.59,1967.52) R2.1@1140.21,1953.15
SWCLK: P1.3 U6.37 | length 814.4
  Top Layer w10: U6.37 v1(1095,1760) v1(1095,1760)
  Bottom Layer w10: v1(1095,1760) 1823,1760 P1.3
SWDIO: P1.2 U6.34 | length 860.5
  Top Layer w10: U6.34 1145.63,1655.63 1165,1675 1165,1720 1280,1835 1655,1835 1681,1809 P1.2
TXD_G: U3.20 U6.31 | length 1020.5
  Top Layer w10: v1(965,1580) 981.58,1596.57 U6.31 ; U3.20 1280.23,980.23 1330,1030 v1(1330,1225)
  Bottom Layer w10: v1(965,1580) 965,1460 1175,1250 1305,1250 v1(1330,1225)
TXD_S: D5.2 P2.2 U6.21 | length 1513.9
  Top Layer w10: U6.21 950.94,1325 975,1300.94 975,280 1067,188 P2.2
  Bottom Layer w10: D5.2@1063.46,132.78 cw(c1054.93,124.24) 1067,124.24 cw(c1079.07,124.24) D5.2@1070.54,132.78 ; P2.2 D5.2@1067,137.32
TXD_USB: U6.12 U8.25 | length 538.9
  Top Layer w10: U6.12 750,1456.97 750,1200 740,1190 v1(740,1175) ; U8.25 791.5,1056.5 v1(815,1080)
  Bottom Layer w10: v1(740,1175) 740,1170 815,1095 v1(815,1080)
USB-VBUS: C14.1 C18.1 C19.1 R6.1 R21.2 U7.4 U7.8 U8.7 U8.8 U9.1 U10.5 | length 2653.3
  Top Layer w10: U8.7 702,822.44 710,814.44 U8.8 ; U10.5 727.69,562.69 750,585 v1(790,585) 895,585 911,601 R21.2 ; R21.2@904.79,620.79 cw(c889.8,605.8) 911,605.8 cw(c932.2,605.8) R21.2@917.21,620.79
  Top Layer w15: v1(690,795) 690,810.44 702,822.44
  Top Layer w20: U7.8 166,559 195,530 320,530 338.46,511.54 R6.1 v2(338.46,410) 338.46,376.54 338.5,376.5 C18.1 338.5,319.5 393,265 675,265 710,230 U9.1 ; C18.1@333.2,338.3 ccw(c320.39,351.11) 338.5,351.11 ccw(c356.61,351.11) C18.1@343.8,338.3 ; U7.4 487,737 505,755 v2(505,795)
  Bottom Layer w20: v2(338.46,410) 338.46,563.46 360,585 ; v1(690,795) v2(505,795) 385,795 338.46,748.46 338.46,606.54 360,585 ; v1(790,585) 360,585
VDD: C1.2 C4.1 C5.1 C7.1 C8.1 C13.2 C20.1 C21.1 P1.1 P2.4 P3.1 R2.2 R3.1 R4.2 R5.1 R7.2 R8.2 R14.1 U1.5 U2.3 U2.7 U2.8 U3.23 U6.1 U6.9 U6.24 U6.36 U6.48 | length 3056
  Top Layer w10: U6.9 792.48,1537.52 815,1515 v1(815,1510) ; U6.1 795,1695 ; U6.48 793.46,1696.54 795,1695 ; v1(810,1675) 810,1680 795,1695 ; U6.24 1072.5,1413.5 C20.1 1182,1383 v1(1200,1365) ; U6.36 1120,1695 1135,1710 v1(1135,1810) ; 1081.29,1404.71 ccw(c1103,1426.42) C20.1@1103,1395.72 ; C20.1@1090.8,1395.2 cw(c1082.53,1386.94) C20.1@1094.22,1386.94 ; C20.1@1109.21,1376.79 cw(c1124.2,1361.8) 1124.2,1383 cw(c1124.2,1404.2) C20.1@1109.21,1389.21 ; U2.8 1427.5,1570 1440.5,1557 1463.5,1557 1477.5,1571 U2.7 ; U2.8@1433.89,1575.14 ccw(c1445.47,1569.97) 1436.5,1561 ; 1467,1560.5 ccw(c1456.13,1571.37) U2.7@1470.82,1575.93 ; U2.3@1522.55,1353.05 cw(c1510.6,1341.1) 1527.5,1341.1 cw(c1544.4,1341.1) U2.3@1532.45,1353.05 ; v1(1527.5,1287.5) U2.3
  Top Layer w15: U1.5 239.5,2024.5 264.5,2049.5 C1.2 395.5,2049.5 430,2015 430,1915 ; v1(365,1325) 371,1331 R8.2 ; C1.2@372.93,2042.43 ccw(c355.86,2025.36) 355.86,2049.5 ccw(c355.86,2073.64) C1.2@372.93,2056.57 ; C1.2@380,2037 cw(c380,1969.4) 427.8,2017.2 ; C1.2@380,2052 cw(c380,2020.62) 402.19,2042.81 ; v1@409.7,1920.3 ccw(c360.68,1969.32) 430,1969.32 ; v1@420.3,1909.7 ccw(c396.89,1933.11) 430,1933.11 ; R8.2@422.95,1326.56 ccw(c412.23,1315.84) 412.23,1331 ccw(c412.23,1346.16) R8.2@422.95,1335.44 ; v1(1060,355) 1089,326 R5.1 ; R5.1@1169.56,321.56 ccw(c1158.84,310.84) 1158.84,326 ccw(c1158.84,341.16) R5.1@1169.56,330.44 ; v1(1342.5,1616) U2.8 ; C7.1@1346.94,1611.56 cw(c1357.66,1600.84) 1357.66,1616 cw(c1357.66,1631.16) C7.1@1346.94,1620.44 ; C7.1@1347.81,1610.7 cw(c1360.61,1597.89) 1360.61,1616 cw(c1360.61,1634.11) C7.1@1347.81,1621.3 ; v1@1760,1512.5 cw(c1760,1494.39) 1772.8,1507.2 cw(c1785.61,1520) v1@1767.5,1520 ; v1(1760,1520) 1802,1478 R14.1 ; v1(1775,765) 1775,756 R3.1 ; R14.1@1814.56,1473.56 ccw(c1803.84,1462.84) 1803.84,1478 ccw(c1803.84,1493.16) R14.1@1814.56,1482.44
  Top Layer w20: v1(1078,1080.5) 1139.5,1080.5 1150.31,1069.69 U3.23 ; C4.1@1083.3,1075.2 cw(c1096.11,1062.39) 1096.11,1080.5 cw(c1096.11,1098.61) C4.1@1083.3,1085.8 ; P2.4 1267,137 1363,233 R7.2
  Bottom Layer w15: P3.1@818.68,2009.42 cw(c781.07,1971.82) 834.25,1971.82 cw(c887.43,1971.82) P3.1@849.83,2009.42 ; C13.2@829.56,1952.38 ccw(c818.23,1963.71) 834.25,1963.71 ; C13.2 834.25,1944.25 P3.1 ; 834.25,1962.49 ccw(c848.55,1962.49) C13.2@838.44,1952.38 ; R4.2 R2.2 ; R4.2@1038.69,1887.38 cw(c1049.41,1876.66) 1049.41,1891.82 cw(c1049.41,1906.98) R4.2@1038.69,1896.26 ; v1@1079.7,1886.52 ccw(c1066.89,1873.71) 1066.89,1891.82 ccw(c1066.89,1909.93) v1@1079.7,1897.12 ; v1@1090.3,1886.52 cw(c1103.11,1873.71) 1103.11,1891.82 cw(c1103.11,1909.93) v1@1090.3,1897.12 ; R2.2@1129.56,1887.38 ccw(c1118.84,1876.66) 1118.84,1891.82 ccw(c1118.84,1906.98) R2.2@1129.56,1896.26
  other v1: 1095,1020 1050,1035 455,1875 1085,1891.82 415,1915 495,1915
pads on no net: S1.0 S3.0 S6.0 U3.1 U3.2 U3.4 U3.5 U3.6 U3.14 U3.15 U3.16 U3.17 U3.18 U3.19 U6.2 U6.3 U6.4 U6.10 U6.14 U6.15 U6.16 U6.17 U6.18 U6.19 U6.38 U6.39 U6.40 U6.41 U6.45 U6.46 U8.1 U8.2 U8.10 U8.12 U8.13 U8.14 U8.15 U8.16 U8.17 U8.18 U8.19 U8.20 U8.21 U8.22 U8.23 U8.24 U8.27 U8.28 U9.4

## Polygon pours and split planes (outlines as drawn)
GND on Top Layer "Bottom Layer-No Net" (solid, remove dead copper, pour order 1000): 1825,0 1868.5,0 ccw(c1868.5,100) 1968.5,100 1968.5,130 1968.5,2125 ccw(c1868.5,2125) 1868.5,2225 1195,2225 100,2225 ccw(c100,2125) 0,2125 0,1105 0,100 ccw(c100,100) 100,0 1825,0
GND on Bottom Layer "Bottom Layer-No Net" (solid, remove dead copper, pour order 1001): 1825,0 1868.5,0 ccw(c1868.5,100) 1968.5,100 1968.5,130 1968.5,2125 ccw(c1868.5,2125) 1868.5,2225 1195,2225 100,2225 ccw(c100,2125) 0,2125 0,1105 0,100 ccw(c100,100) 100,0 1825,0
GND on GND (split plane): 1885.36,2204.65 1892.16,2203.64 1898.82,2201.97 1905.29,2199.66 1911.49,2196.72 1917.39,2193.19 1922.9,2189.1 1927.99,2184.49 1932.6,2179.4 1936.69,2173.88 1940.22,2167.99 1943.16,2161.78 1945.47,2155.32 1947.14,2148.65 1948.15,2141.86 1948.46,2135.55 1948.41,2135 1948.41,90 1948.46,89.45 1948.15,83.14 1947.14,76.35 1945.47,69.68 1943.16,63.22 1940.22,57.01 1936.69,51.12 1932.6,45.6 1927.99,40.51 1922.9,35.9 1917.39,31.81 1911.49,28.28 1905.29,25.34 1898.82,23.03 1892.16,21.36 1885.36,20.35 1879.05,20.04 1878.5,20.1 90,20.1 89.45,20.04 83.14,20.35 76.35,21.36 69.68,23.03 63.22,25.34 57.01,28.28 51.12,31.81 45.6,35.9 40.51,40.51 35.9,45.6 31.81,51.12 28.28,57.01 25.34,63.22 23.03,69.68 21.36,76.35 20.35,83.14 20.04,89.45 20.1,90 20.1,2135 20.04,2135.55 20.35,2141.86 21.36,2148.65 23.03,2155.32 25.34,2161.78 28.28,2167.99 31.81,2173.88 35.9,2179.4 40.51,2184.49 45.6,2189.1 51.12,2193.19 57.01,2196.72 63.22,2199.66 69.68,2201.97 76.35,2203.64 83.14,2204.65 89.45,2204.96 90,2204.9 1878.5,2204.9 1879.05,2204.96
VDD on VDD (split plane): 1885.36,2204.65 1892.16,2203.64 1898.82,2201.97 1905.29,2199.66 1911.49,2196.72 1917.39,2193.19 1922.9,2189.1 1927.99,2184.49 1932.6,2179.4 1936.69,2173.88 1940.22,2167.99 1943.16,2161.78 1945.47,2155.32 1947.14,2148.65 1948.15,2141.86 1948.46,2135.55 1948.41,2135 1948.41,90 1948.46,89.45 1948.15,83.14 1947.14,76.35 1945.47,69.68 1943.16,63.22 1940.22,57.01 1936.69,51.12 1932.6,45.6 1927.99,40.51 1922.9,35.9 1917.39,31.81 1911.49,28.28 1905.29,25.34 1898.82,23.03 1892.16,21.36 1885.36,20.35 1879.05,20.04 1878.5,20.1 915,20.1 915,910 20.1,910 20.1,2135 20.04,2135.55 20.35,2141.86 21.36,2148.65 23.03,2155.32 25.34,2161.78 28.28,2167.99 31.81,2173.88 35.9,2179.4 40.51,2184.49 45.6,2189.1 51.12,2193.19 57.01,2196.72 63.22,2199.66 69.68,2201.97 76.35,2203.64 83.14,2204.65 89.45,2204.96 90,2204.9 1878.5,2204.9 1879.05,2204.96

## Keep-outs
Keep-Out Layer:
  circle w10: c196.85,196.85 r59.06
  circle w10: c1771.65,2028.15 r59.06
  lines w8: 0,70.32 ccw(c90,70.32) 90,-19.68 1878.5,-19.68 ccw(c1878.5,70.32) 1968.5,70.32 1968.5,2135 ccw(c1878.5,2135) 1878.5,2225 90,2225 ccw(c90,2135) 0,2135 0,70.32

## Other copper
Top Layer:
  rectangle net VDD: 1035,1010 1105,1090
  rectangle net VDD: 400,1860 510,1930
VDD (plane layer: these items are gaps in the copper):
  rectangle: 10,15 915,910